# Altium PCB limit-sw1u.PcbDoc
Units mm, origin at the board's own origin, x right, y up, seen from the top; angles counter-clockwise.
Board outline 15.85 x 13.2 mm, 2 copper layers (Top Layer, Bottom Layer), stack 1.07 mm thick; 2 components, 6 nets, 17 pads, 0 vias.
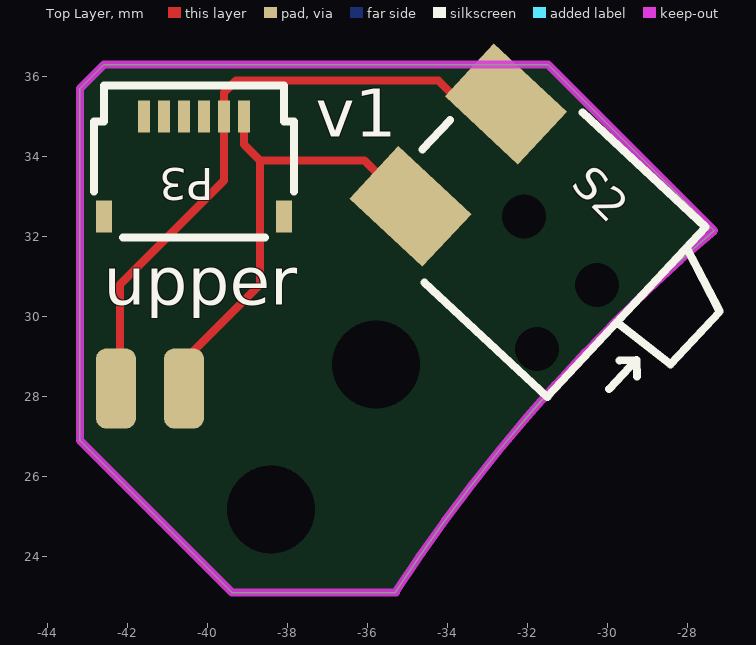
[diagram p0: Top Layer view]
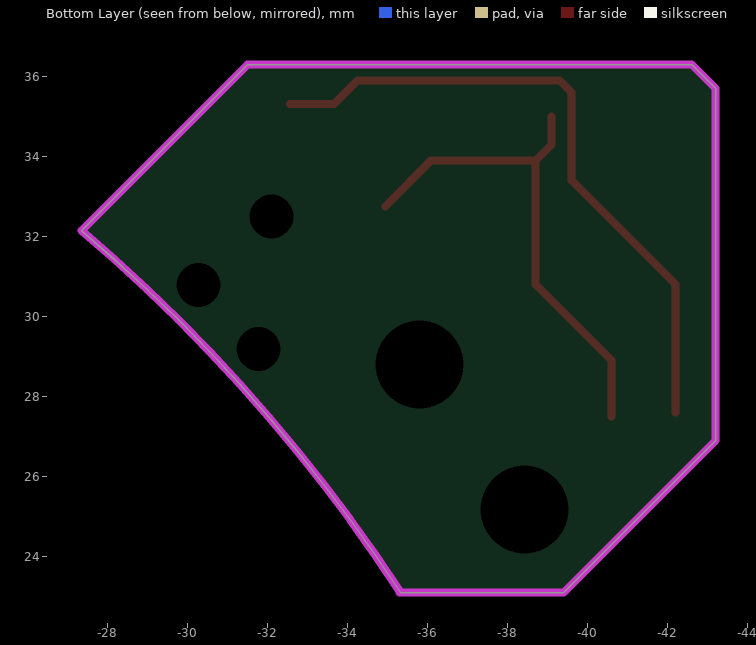
[diagram p1: Bottom Layer view, seen from below]

## Layer stack, top to bottom
Top Solder: solder mask 0.0254, SM-001, Dk 4
Top Layer: signal copper 0.035
Dielectric 1: core 1, Core-043, Dk 4.3
Bottom Layer: signal copper 0.035
Bottom Solder: solder mask 0.0254, SM-001, Dk 4

## Board outline
-39.4,23.1 -43.2,26.9 -43.2,35.7 -42.6,36.3 -31.5,36.3 -27.35,32.15 -27.346,32.146 ccw(c0,0) -35.321,23.1

## Design rules (kind name [scope] priority, off if disabled: settings)
Clearance [All] p1: gap=0.15 ignorepadtopadclearanceinfootprint=FALSE except(0: Arc-Hole Track-Hole SMDPad-Hole THPad-Hole Via-Hole Fill-Hole Poly-Hole Region-Hole Text-Hole)
PolygonConnect [All] p1: connectstyle=Relief reliefconductorwidth=0.254 reliefentries=4 polygonreliefangle="90 Angle" airgapwidth=0.254
RoutingVias [All] p1: holewidth=0.3 width=0.6 viastyle="Through Hole" minholewidth=0.3 minwidth=0.6 maxholewidth=0.5 maxwidth=0.8
SolderMaskExpansion [All] p1: expansion=0.102 istentingtop=FALSE
Width [All] p1: maxlimit=5 minlimit=0.15 preferedwidth=0.15
30 further rules are at their usual default settings.

## Components (designator, comment, footprint, x,y, rotation, side; value= is the part's Value field where it differs from the comment)
P3 "FH34SRJ-6S-0.5SH(50)" HRS_FH34SRJ-6S-0.5SH(50) -40.35,35 r0 top
S2 "SW-SPST" ESE22MH24 -32.1,32.5 r227 top

## Footprints (in the part's own frame and the unit in brackets; to place one, negate y for a bottom-side part, rotate by r counter-clockwise, add the part's x,y. Pads: shape width x height; smd on the part's side, far side on the other; paste and mask are expansions set on the pad)
ESE22MH24 [mm] "Detector switch"
  round 1 hole 1.1 unplated: 0(0,0) 0(0,2.5) 0(2.2,2.5)
  rect 1.8x2.5 smd: 1(-1.75,-2.25) 2(1.75,-2.25)
  silkscreen extent -2.9,-3 2.9,5.2, body extent -2.87,-2.95 2.88,5.7, height 2
HRS_FH34SRJ-6S-0.5SH(50) [mm] "Top/bottom entry, back-lock 0.3mm thick FPC, 6 pins"
  rect 0.4x0.8 smd mask+0.07: 0(-2.25,-2.5) 0(2.25,-2.5)
  rect 0.3x0.8 smd mask+0.07: 1(1.25,0) 2(0.75,0) 3(0.25,0) 4(-0.25,0) 5(-0.75,0) 6(-1.25,0)
  silkscreen extent -2.5,-3.03 2.5,0.77, body extent -2.5,-3.02 2.5,0.78, height 1

## Part data
P3: library part "Header 6", "Header, 6-Pin", LatestRevisionDate=17-Jul-2002, LatestRevisionNote="Re-released for DXP Platform.", MPN=FH34SRJ-6S-0.5SH(50), MYPN=J-FH34SRJ-6S-0.5SH(50), Publisher="Altium Limited", VENDOR=HRS
S2: "Single-Pole, Single-Throw Switch", MPN=ESE22MH24, LatestRevisionDate=17-Jul-2002, LatestRevisionNote="Re-released for DXP Platform.", MFG=Panasonic, PackageReference=SPST-2, Published=24-Mar-1999, Publisher="Altium Limited"

## Free pads (board coordinates)
  round 1 hole 2.2 unplated mask+1.3: 0(-38.425,25.175) 0(-35.8,28.8)
  rrect50% 1x2 smd: 2(-42.3,28.2) 2(-40.6,28.2)

## Nets (pads, with @x,y where several pads share a name; then routed paths per layer and width w, separated by ;. In a path a pad name is that pad's centre, name@x,y a point inside that pad or via, vN(x,y) a via of type N, cw(c..) or ccw(c..) an arc to the next point about the centre after c; other vN are vias at no path point)
NetP1_1: 
NetP1_2: 
NetP1_5: 
NetP1_6: 
NetP3_1: P3.1 pad.2@-40.6,28.2 S2.2 | length 12.7
  Top Layer w0.2: pad.2@-40.6,27.5 -40.6,28.9 -38.7,30.8 -38.7,33.9 ; P3.1 -39.1,34.3 -38.7,33.9 ; S2.2 -36.084,33.9 -38.7,33.9
NetP3_2: P3.2 pad.2@-42.3,28.2 S2.1 | length 16.5
  Top Layer w0.2: pad.2@-42.2,27.6 -42.2,30.8 -39.6,33.4 P3.2 -39.6,35.6 -39.3,35.9 -34.241,35.9 -33.656,35.314 S2.1
pads on no net: P3.0 P3.3 P3.4 P3.5 P3.6 S2.0

## Keep-outs
Keep-Out Layer:
  lines w0.2: -35.321,23.1 cw(c0,0) -27.346,32.146 ; -35.3,23.1 -39.4,23.1 -43.2,26.9 -43.2,35.7 -42.6,36.3 -31.5,36.3 -27.35,32.15

## Silkscreen, mask and mechanical layers (free items; w line width, h text height)
Top Overlay:
  text "v1" at -37.3,34.5 h1.2
  text "upper" at -42.6,30.3 h1.2
Mechanical 2:
  circle w0.05: c-19.5,27.5 r0.025
  lines w0.05: -45.667,5.088 cw(c0,0) -32.777,32.203 ; -41.679,2.094 cw(c0.048,0.016) -31.033,27.933
  lines w0.1: -52.871,0 0,0 0,39.653 ; -31.457,22.319 -29.616,24.54 -27.229,22.562 -28.843,20.615 ; -17.5,30.901 -17.5,39.653 ; 4.899,30 -19.5,30 -19.5,29.5 ; -37.863,6.764 cw(c0,0) -21.852,31.652 ; -37.863,6.764 ccw(c-36.386,6.5) -36.386,5 ; -37.863,6.764 ccw(c-36.386,6.5) -36.386,5 ; -37.863,6.764 cw(c0,0) -21.852,31.652 ; -36.386,5 -36.285,5 ; -36.386,5 -36.285,5 ; -36.285,5 ccw(c-36.285,6.5) -34.808,6.236 ; -36.285,5 ccw(c-36.285,6.5) -34.808,6.236 ; -34.808,6.236 cw(c0,0) -20.145,29.063 ; -34.808,6.236 cw(c0,0) -20.145,29.063 ; -31.5,37.153 -31.5,36.806 ccw(c0,0) -48.222,4.644 ccw(c-46.729,4.5) -46.729,3 -34.923,3 ccw(c-34.923,4.5) -33.436,4.308 cw(c0,0) -17.9,28.567 -17.9,30 -17.5,30 -17.5,37.153 ; -31.5,37.153 -17.5,37.153 ; -31.5,37.153 -31.5,26.626 ccw(c0,0) -41.136,3 -33.578,3 cw(c0,0) -17.5,28.814 -17.5,37.153 ; -31.5,37.153 -17.5,37.153 ; -21.852,31.652 cw(c-21,30.417) -19.5,30.417 ; -21.852,31.652 cw(c-21,30.417) -19.5,30.417 ; -20.145,29.063 ccw(c-21,30.296) -19.5,30.296 ; -20.145,29.063 ccw(c-21,30.296) -19.5,30.296 ; -19.5,29.5 ccw(c0,0) -35.007,5 -38.136,5 cw(c0,0) -19.5,33.153 -19.5,29.5 ; -19.5,30.296 -19.5,30.417 ; -19.5,30.296 -19.5,30.417 ; -46.572,6.656 ccw(c-45.483,6.5) -44.394,6.344 cw(c0,0) -32.698,30.691 ccw(c-33.5,31.444) -34.302,32.197 ccw(c0,0) -46.572,6.656
  lines w0.2: -31.033,27.933 -28.7,25.6
Mechanical 3:
  lines w0.2: -34.6,39.8 -34.6,38 -33.3,36.7
  lines w0.381: -51.312,53.604 -40.9,53.604 -17.284,53.604 -2.048,53.604 14.458,53.604 28.932,53.604 ; -51.312,56.652 -40.9,56.652 -17.284,56.652 -2.048,56.652 14.458,56.652 28.932,56.652 ; -51.312,59.7 -40.9,59.7 -17.284,59.7 -2.048,59.7 14.458,59.7 28.932,59.7 ; -51.312,62.748 -40.9,62.748 -17.284,62.748 -2.048,62.748 14.458,62.748 28.932,62.748 ; -51.312,65.796 -40.9,65.796 -17.284,65.796 -2.048,65.796 14.458,65.796 28.932,65.796 ; -51.312,68.844 -40.9,68.844 -17.284,68.844 -2.048,68.844 14.458,68.844 28.932,68.844 ; -51.312,71.892 28.932,71.892 ; -40.9,74.94 -40.9,50.556 ; -17.284,74.94 -17.284,50.556 ; -2.048,74.94 -2.048,50.556 ; 14.458,74.94 14.458,50.556 ; -40.9,50.556 -51.312,50.556 -51.312,74.94 28.932,74.94 28.932,50.556 14.458,50.556 ; -40.9,50.556 -17.284,50.556 ; -17.284,50.556 -2.048,50.556 ; -2.048,50.556 14.458,50.556
  text "Layer" at -49.534,72.654 h1.52
  text "Name" at -39.122,72.654 h1.52
  text "Material" at -15.506,72.654 h1.52
  text "Thickness" at -0.27,72.654 h1.52
  text "Constant" at 16.236,72.654 h1.52
  text "Top Overlay" at -39.122,69.606 h1.52
  text "Top Solder" at -39.122,66.558 h1.52
  text "SM-001" at -15.506,66.558 h1.52
  text "0.025mm" at -0.27,66.558 h1.52
  text "4" at 16.236,66.558 h1.52
  text "1" at -49.534,63.51 h1.52
  text "Top Layer" at -39.122,63.51 h1.52
  text "CF-004" at -15.506,63.51 h1.52
  text "0.035mm" at -0.27,63.51 h1.52
  text "Dielectric 1" at -39.122,60.462 h1.52
  text "Core-043" at -15.506,60.462 h1.52
  text "1.000mm" at -0.27,60.462 h1.52
  text "4.3" at 16.236,60.462 h1.52
  text "2" at -49.534,57.414 h1.52
  text "Bottom Layer" at -39.122,57.414 h1.52
  text "CF-004" at -15.506,57.414 h1.52
  text "0.035mm" at -0.27,57.414 h1.52
  text "Bottom Solder" at -39.122,54.366 h1.52
  text "SM-001" at -15.506,54.366 h1.52
  text "0.025mm" at -0.27,54.366 h1.52
  text "4" at 16.236,54.366 h1.52
  text "Bottom Overlay" at -39.122,51.318 h1.52
  text "Surface Finish: HASL" at -39.6,47.7 h1.5
  text "Solder mask: Green / Silk: White" at -39.6,44.9 h1.5
  text "OK for pad cut during final route-out" at -57.2,40.5 h1.2